# Altium PCB Access_System_F.PcbDoc
Units mm, origin at the board's own origin, x right, y up, seen from the top; angles counter-clockwise.
Board outline 66.67 x 60.71 mm, 2 copper layers (Top Layer, Bottom Layer); 8 components, 8 nets, 59 pads, 9 vias.
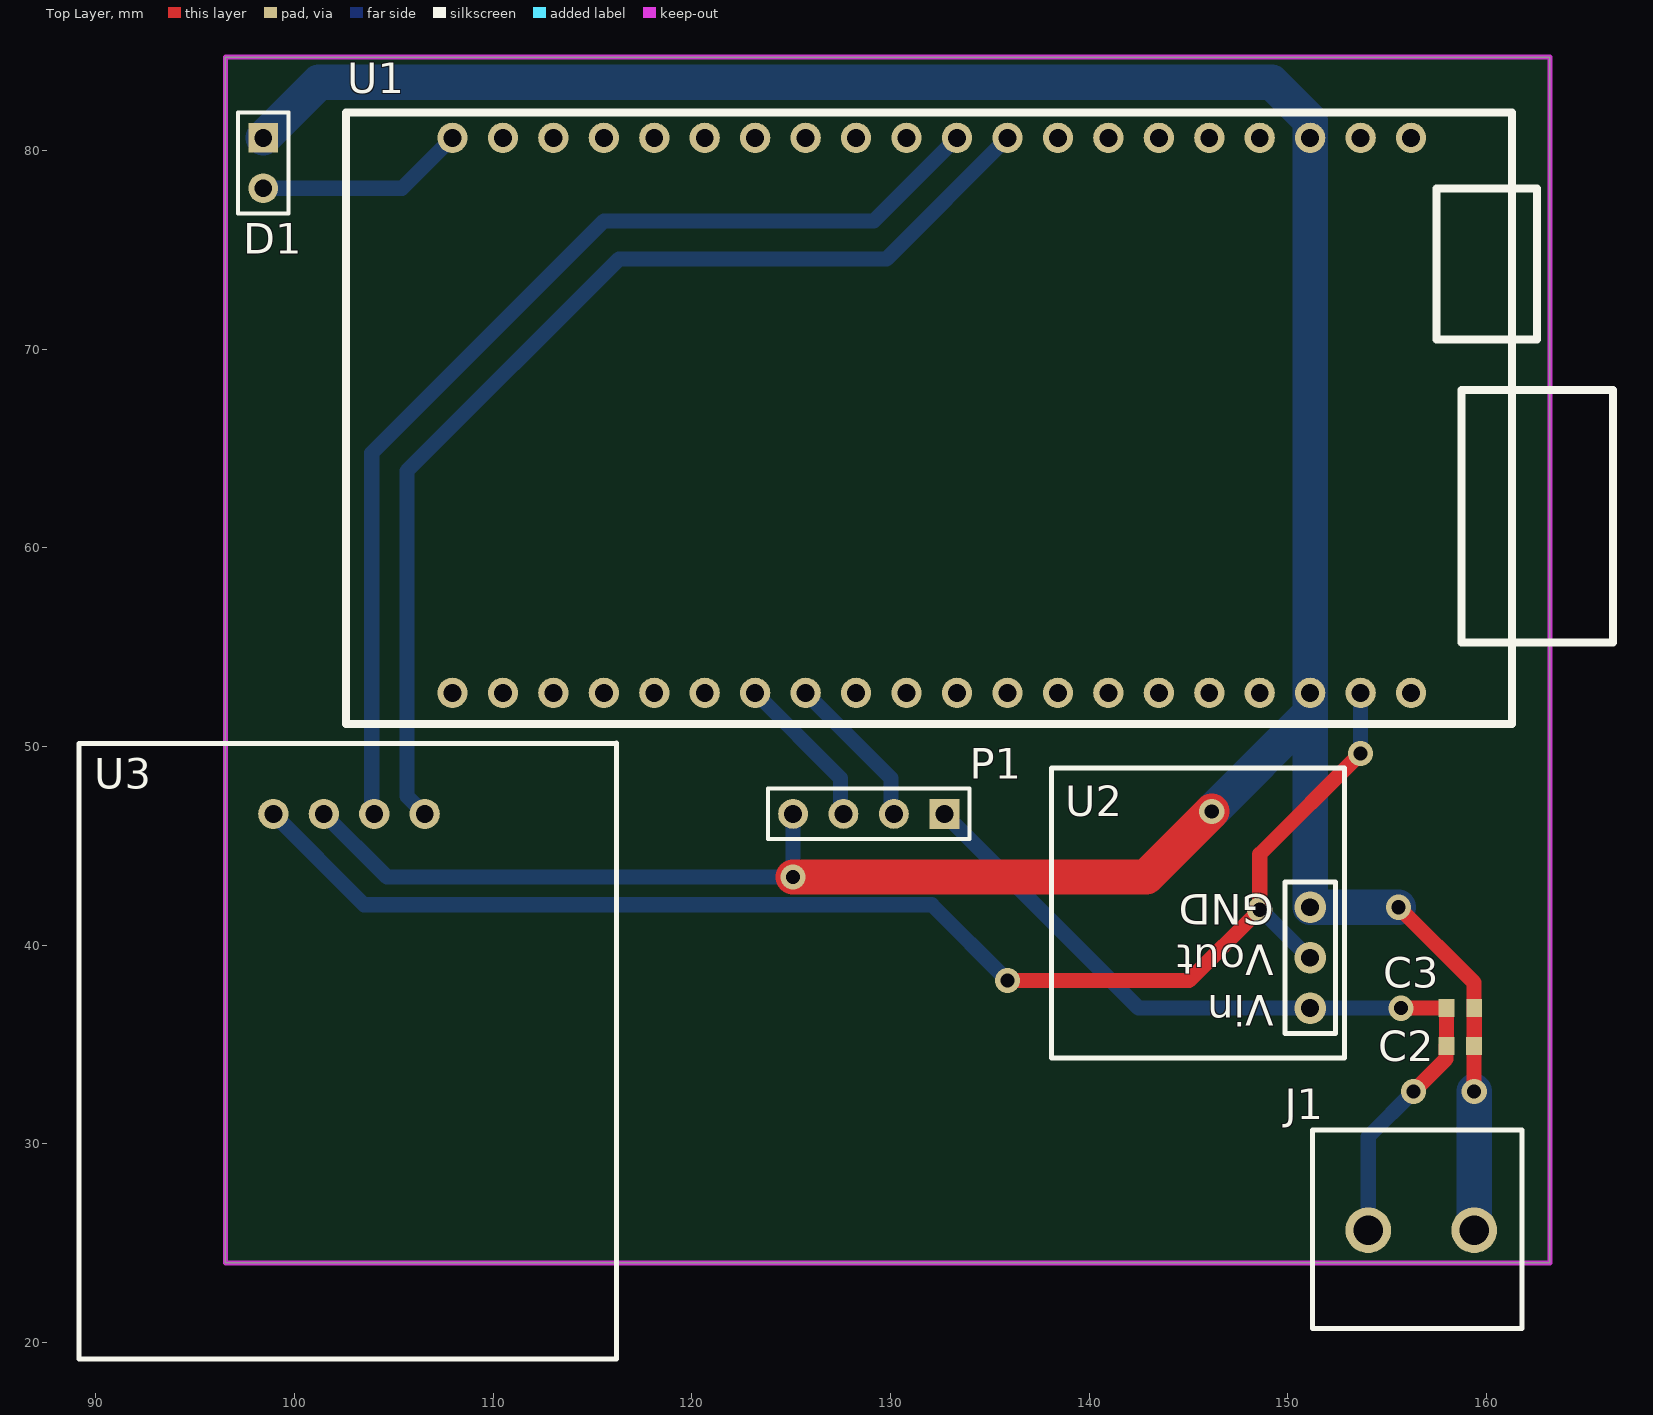
[diagram p0: Top Layer view]
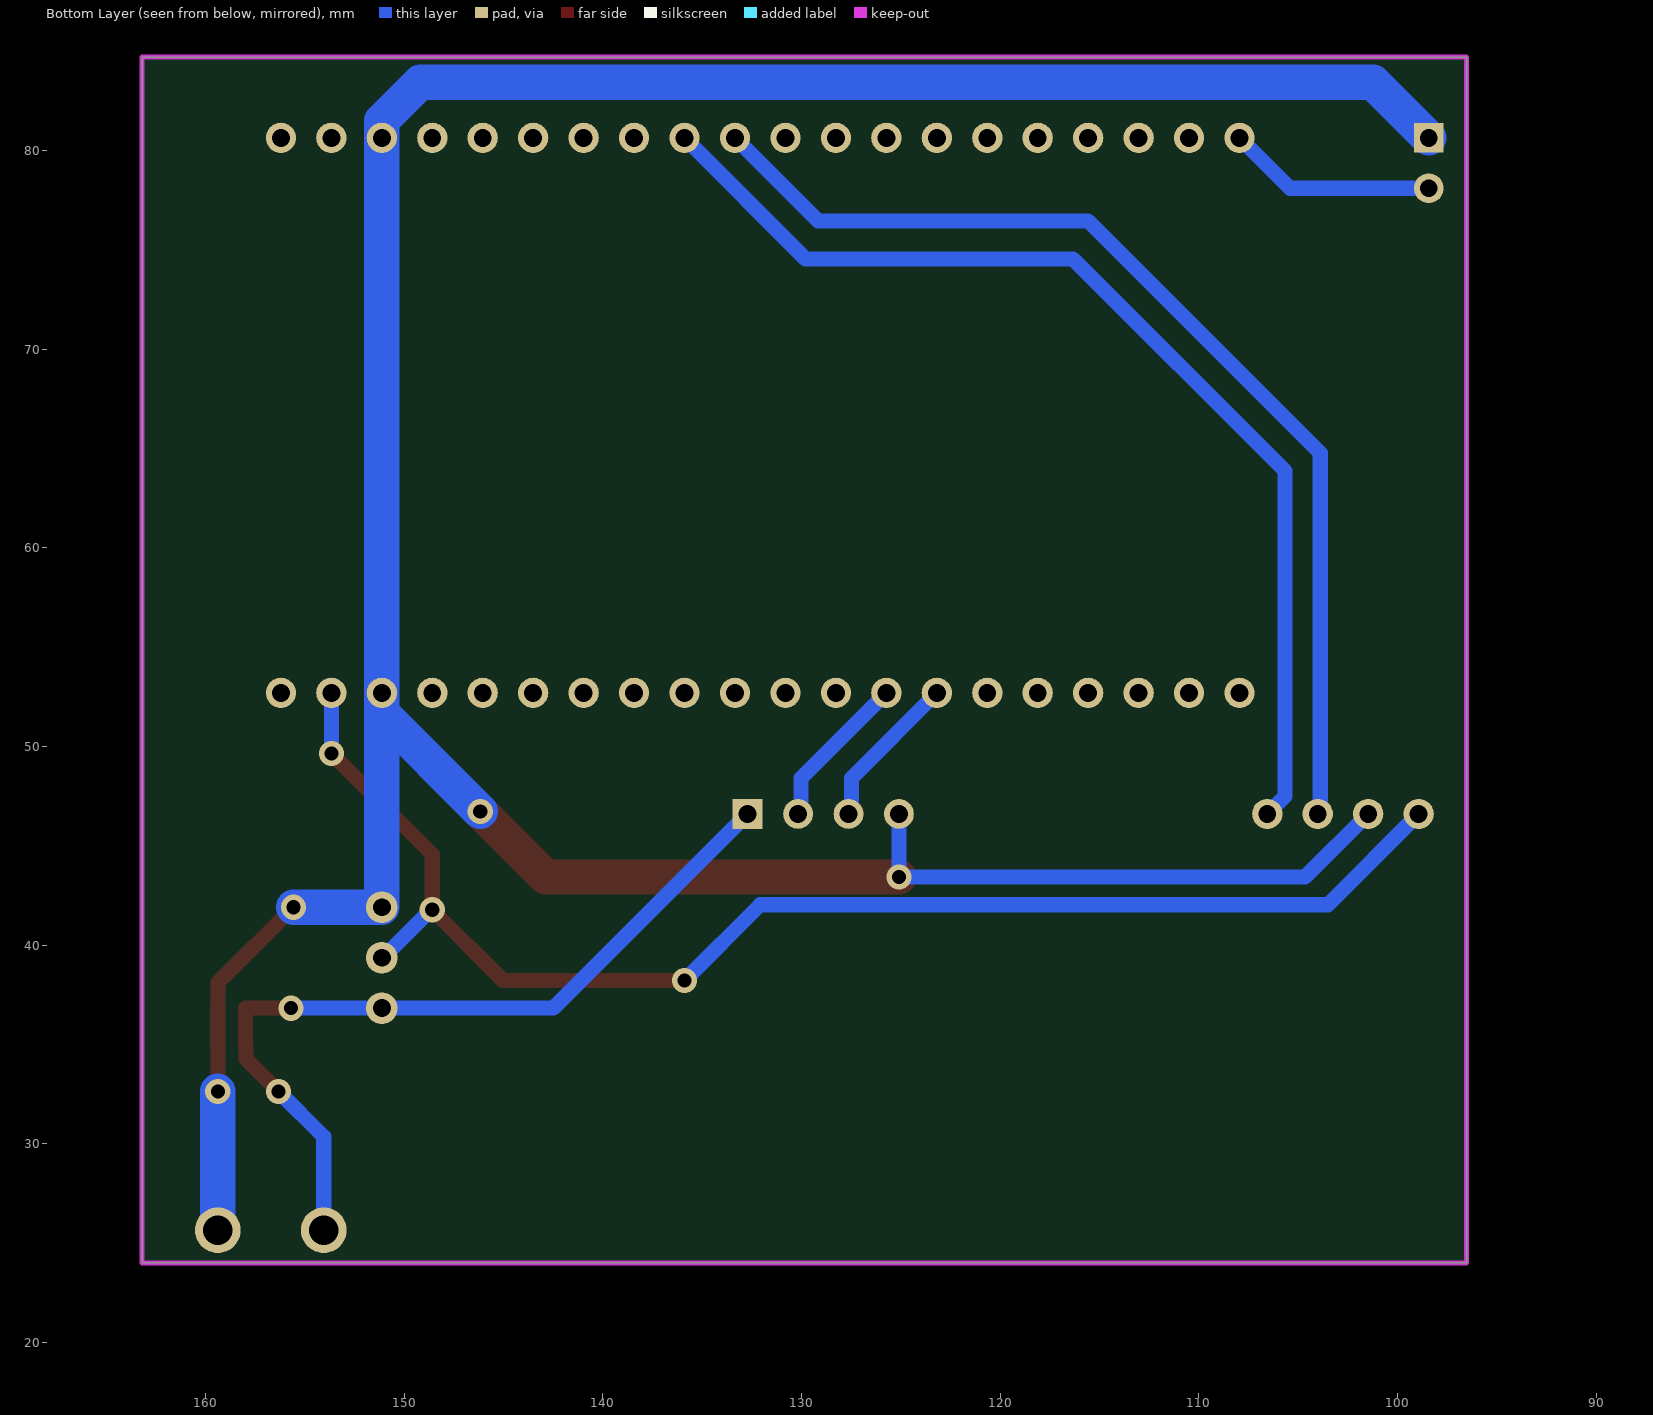
[diagram p1: Bottom Layer view, seen from below]

## Layer stack, top to bottom
Top Solder: solder mask 0.0102, Solder Resist, Dk 3.5
Top Layer: signal copper 0.0356
Dielectric 1: dielectric 0.32, FR-4, Dk 4.8
Bottom Layer: signal copper 0.0356
Bottom Solder: solder mask 0.0102, Solder Resist, Dk 3.5

## Board outline
96.52,24.003 96.52,84.709 163.195,84.709 163.195,24.003

## Design rules (kind name [scope] priority, off if disabled: settings)
Clearance [All] p1: gap=0.254 ignorepadtopadclearanceinfootprint=FALSE except(0: Arc-Hole Track-Hole SMDPad-Hole THPad-Hole Via-Hole Fill-Hole Poly-Hole Region-Hole Text-Hole)
PolygonConnect [All] p1: connectstyle=Relief reliefconductorwidth=0.254 reliefentries=4 polygonreliefangle="90 Angle" airgapwidth=0.254
RoutingVias [All] p1: holewidth=0.711 width=1.27 viastyle="Through Hole" minholewidth=0.711 minwidth=1.27 maxholewidth=0.711 maxwidth=1.27
SolderMaskExpansion [All] p1: expansion=0.102 istentingtop=FALSE
Width [All] p1: maxlimit=1.778 minlimit=0.254 preferedwidth=0.762 minimp=50.000000 maximp=50.000000 favimp=50.000000
30 further rules are at their usual default settings.

## Classes and differential pairs
component class Access_System_F: C3 D1 J1 P1 U1 U2 U3

## Components (designator, comment, footprint, x,y, rotation, side; value= is the part's Value field where it differs from the comment)
C2 "Cap Semi" 1608[0603] 158.685,34.925 r180 top value=2.2uF
C3 "Cap Semi" 1608[0603] 158.688,36.83 r180 top value=10uF
D1 "STATE LED" HDR1X2 98.425,80.645 r270 top
J1 "MX128V" MX128V 154.051,25.654 r90 top
P1 "Barcode" HDR1X4 132.715,46.609 r180 top
U1 "STM32F103" STM32F103 107.95,80.645 r270 top
U2 "RT9187" RT9187 151.13,36.83 r180 top
U3 "ESP12S" ESP12S 106.553,46.609 r180 top

## Footprints (in the part's own frame and the unit in brackets; to place one, negate y for a bottom-side part, rotate by r counter-clockwise, add the part's x,y. Pads: shape width x height; smd on the part's side, far side on the other; paste and mask are expansions set on the pad)
1608[0603] [mm] "Chip Capacitor, Body 1.6x0.8mm, IPC High Density"
  rect 0.8x0.9 smd: 1(-0.7,0) 2(0.7,0)
  body extent -0.87,-0.48 0.87,0.48, height 1.3
ESP12S [mil]
  round 60 hole 35.43: 0(0,0) 1(100,0) 2(200,0) 3(300,0)
  silkscreen extent -380,-140 685,1080
HDR1X2 [mm] "Connector; Header; 2 Position"
  rect 1.5x1.5 hole 0.9: 1(0,0)
  round 1.5 hole 0.9: 2(2.54,0)
  silkscreen extent -1.27,-1.27 3.81,1.27
HDR1X4 [mm] "Connector; Header; 4 Position"
  rect 1.5x1.5 hole 0.9: 1(0,0)
  round 1.5 hole 0.9: 2(2.54,0) 3(5.08,0) 4(7.62,0)
  silkscreen extent -1.27,-1.27 8.89,1.27
MX128V [mm]
  round 2.3 hole 1.5: 0(0,0) 1(0,-5.334)
  silkscreen extent -4.95,-7.75 5.05,2.79
RT9187 [mm]
  round 1.6 hole 0.9: 1(0,0) 2(0,-2.54) 3(0,-5.08)
  silkscreen extent -1.72,-12.09 13.01,2.52
STM32F103 [mil]
  round 60 hole 35.43: 0(1100,1900) 1(1100,1800) 2(1100,1700) 3(1100,1600) 4(1100,1500) 5(1100,1400) 6(1100,1300) 7(1100,1200) 8(1100,1100) 9(1100,1000) 10(1100,900) 11(1100,800) 12(1100,700) 13(1100,600) 14(1100,500) 15(1100,400) 16(1100,300) 17(1100,200) 18(1100,100) 19(1100,0) 20(0,1900) 21(0,1800) 22(0,1700) 23(0,1600) 24(0,1500) 25(0,1400) 26(0,1300) 27(0,1200) 28(0,1100) 29(0,1000) 30(0,900) 31(0,800) 32(0,700) 33(0,600) 34(0,500) 35(0,400) 36(0,300) 37(0,200) 38(0,100) 39(0,0)
  silkscreen extent -50,-211 1161,2300

## Part data
C2 C3: "Capacitor (Semiconductor SIM Model)", LatestRevisionDate=29-May-2009, LatestRevisionNote="IPC-7351 Footprint Added.", PackageDescription="Chip Capacitor", PackageReference=C1206, Published=8-Jun-2000, Publisher="Altium Limited"
D1: library part "Header 2", "Header, 2-Pin", LatestRevisionDate=17-Jul-2002, LatestRevisionNote="Re-released for DXP Platform.", Publisher="Altium Limited"
P1: library part "Header 4", "Header, 4-Pin", LatestRevisionDate=17-Jul-2002, LatestRevisionNote="Re-released for DXP Platform.", Publisher="Altium Limited"

## Via types
v1: diameter 1.27, hole 0.711, Top Layer to Bottom Layer, 9 vias

## Nets (pads, with @x,y where several pads share a name; then routed paths per layer and width w, separated by ;. In a path a pad name is that pad's centre, name@x,y a point inside that pad or via, vN(x,y) a via of type N, cw(c..) or ccw(c..) an arc to the next point about the centre after c; other vN are vias at no path point)
3.3V: U1.1 U2.2 U3.3 | length 71.2
  Top Layer w0.762: v1(135.89,38.227) 145.034,38.227 v1(148.59,41.783) 148.59,44.577 v1(153.67,49.657)
  Bottom Layer w0.762: U3.3 103.505,42.037 132.08,42.037 v1(135.89,38.227) ; v1(148.59,41.783) 148.653,41.783 151.066,39.37 U2.2 ; v1(153.67,49.657) U1.1
5V: C2.2 C3.2 J1.0 P1.1 U2.1 | length 42.1
  Top Layer w0.762: v1(155.702,36.83) C3.2 157.986,36.828 157.986,34.926 157.966,34.906 157.966,34.268 v1(156.337,32.639)
  Bottom Layer w0.762: P1.1 142.494,36.83 U2.1 v1(155.702,36.83) ; J1.0 154.051,30.353 v1(156.337,32.639)
GND: C2.1 C3.1 D1.1 J1.1 P1.4 U1.2 U1.22 U2.3 U3.2 | length 174.1
  Top Layer w0.762: v1@155.577,41.912 v1(155.575,41.91) 159.369,38.116 159.369,36.849 C3.1 159.386,36.828 159.386,34.926 C2.1 v1(159.385,32.639)
  Top Layer w1.778: v1(125.095,43.434) 142.875,43.434 v1(146.177,46.736)
  Bottom Layer w0.762: U3.2 104.648,43.434 v1(125.095,43.434) P1.4
  Bottom Layer w1.778: D1.1 101.219,83.439 149.199,83.439 151.13,81.508 U1.2 151.13,51.689 ; v1(146.177,46.736) 151.13,51.689 ; v1(155.575,41.91) U2.3 151.13,51.689 ; J1.1 v1(159.385,32.639)
state_LED: D1.2 U1.39 | length 10.6
  Bottom Layer w0.762: D1.2 105.41,78.105 U1.39
UART1_Rx: U1.29 U3.1 | length 54.3
  Bottom Layer w0.762: U3.1 103.886,46.736 103.886,64.77 115.57,76.454 129.159,76.454 U1.29
UART1_Tx: U1.28 U3.0 | length 54.8
  Bottom Layer w0.762: U3.0 105.664,47.498 105.664,63.881 116.332,74.549 129.794,74.549 U1.28
UART2_Rx: P1.2 U1.12 | length 7.9
  Bottom Layer w0.762: U1.12 130.034,48.401 130.034,46.75 P1.2
UART2_Tx: P1.3 U1.13 | length 7.9
  Bottom Layer w0.762: U1.13 127.494,48.401 127.494,46.75 P1.3
pads on no net: U1.0 U1.3 U1.4 U1.5 U1.6 U1.7 U1.8 U1.9 U1.10 U1.11 U1.14 U1.15 U1.16 U1.17 U1.18 U1.19 U1.20 U1.21 U1.23 U1.24 U1.25 U1.26 U1.27 U1.30 U1.31 U1.32 U1.33 U1.34 U1.35 U1.36 U1.37 U1.38

## Keep-outs
Keep-Out Layer:
  lines w0.254: 96.52,24.003 96.52,46.355 96.52,84.709 163.195,84.709 163.195,24.003 96.52,24.003

## Text inside footprints (layer, text, board x,y; h text height)
U2: Top Overlay "GND" at 149.294,42.567 h1.52 r180; Top Overlay "Vout" at 149.294,40.027 h1.52 r180; Top Overlay "Vin" at 149.294,37.487 h1.52 r180